# Altium PCB NODE_5_PCB.PcbDoc
Units mm, origin at the board's own origin, x right, y up, seen from the top; angles counter-clockwise.
Board outline 210 x 231 mm, 2 copper layers (Top Layer, Bottom Layer); 126 components, 110 nets, 444 pads, 0 vias.
Unrouted connection lines stored in the file: 255.
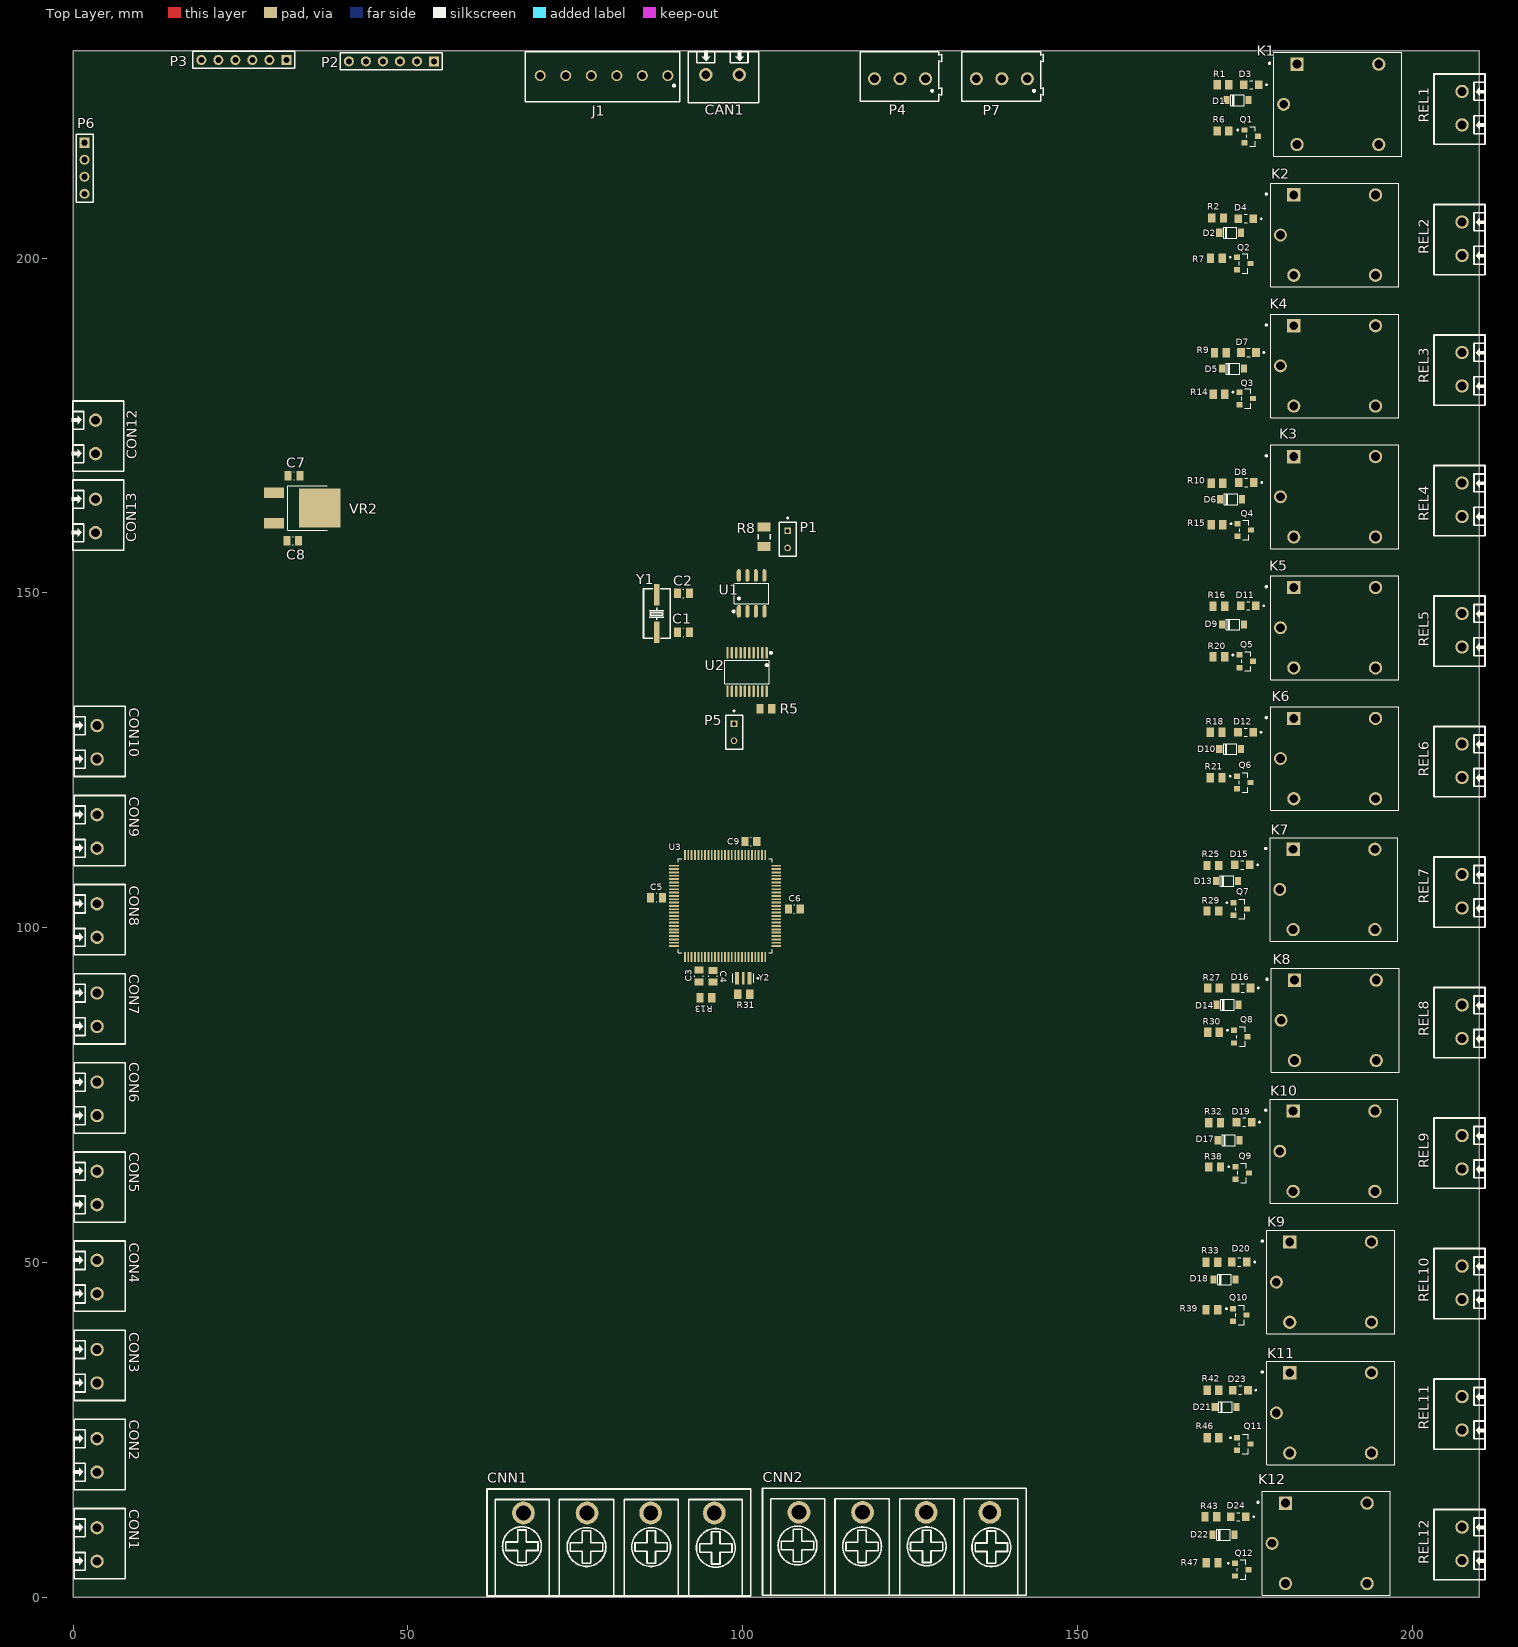
[diagram p0: Top Layer view]
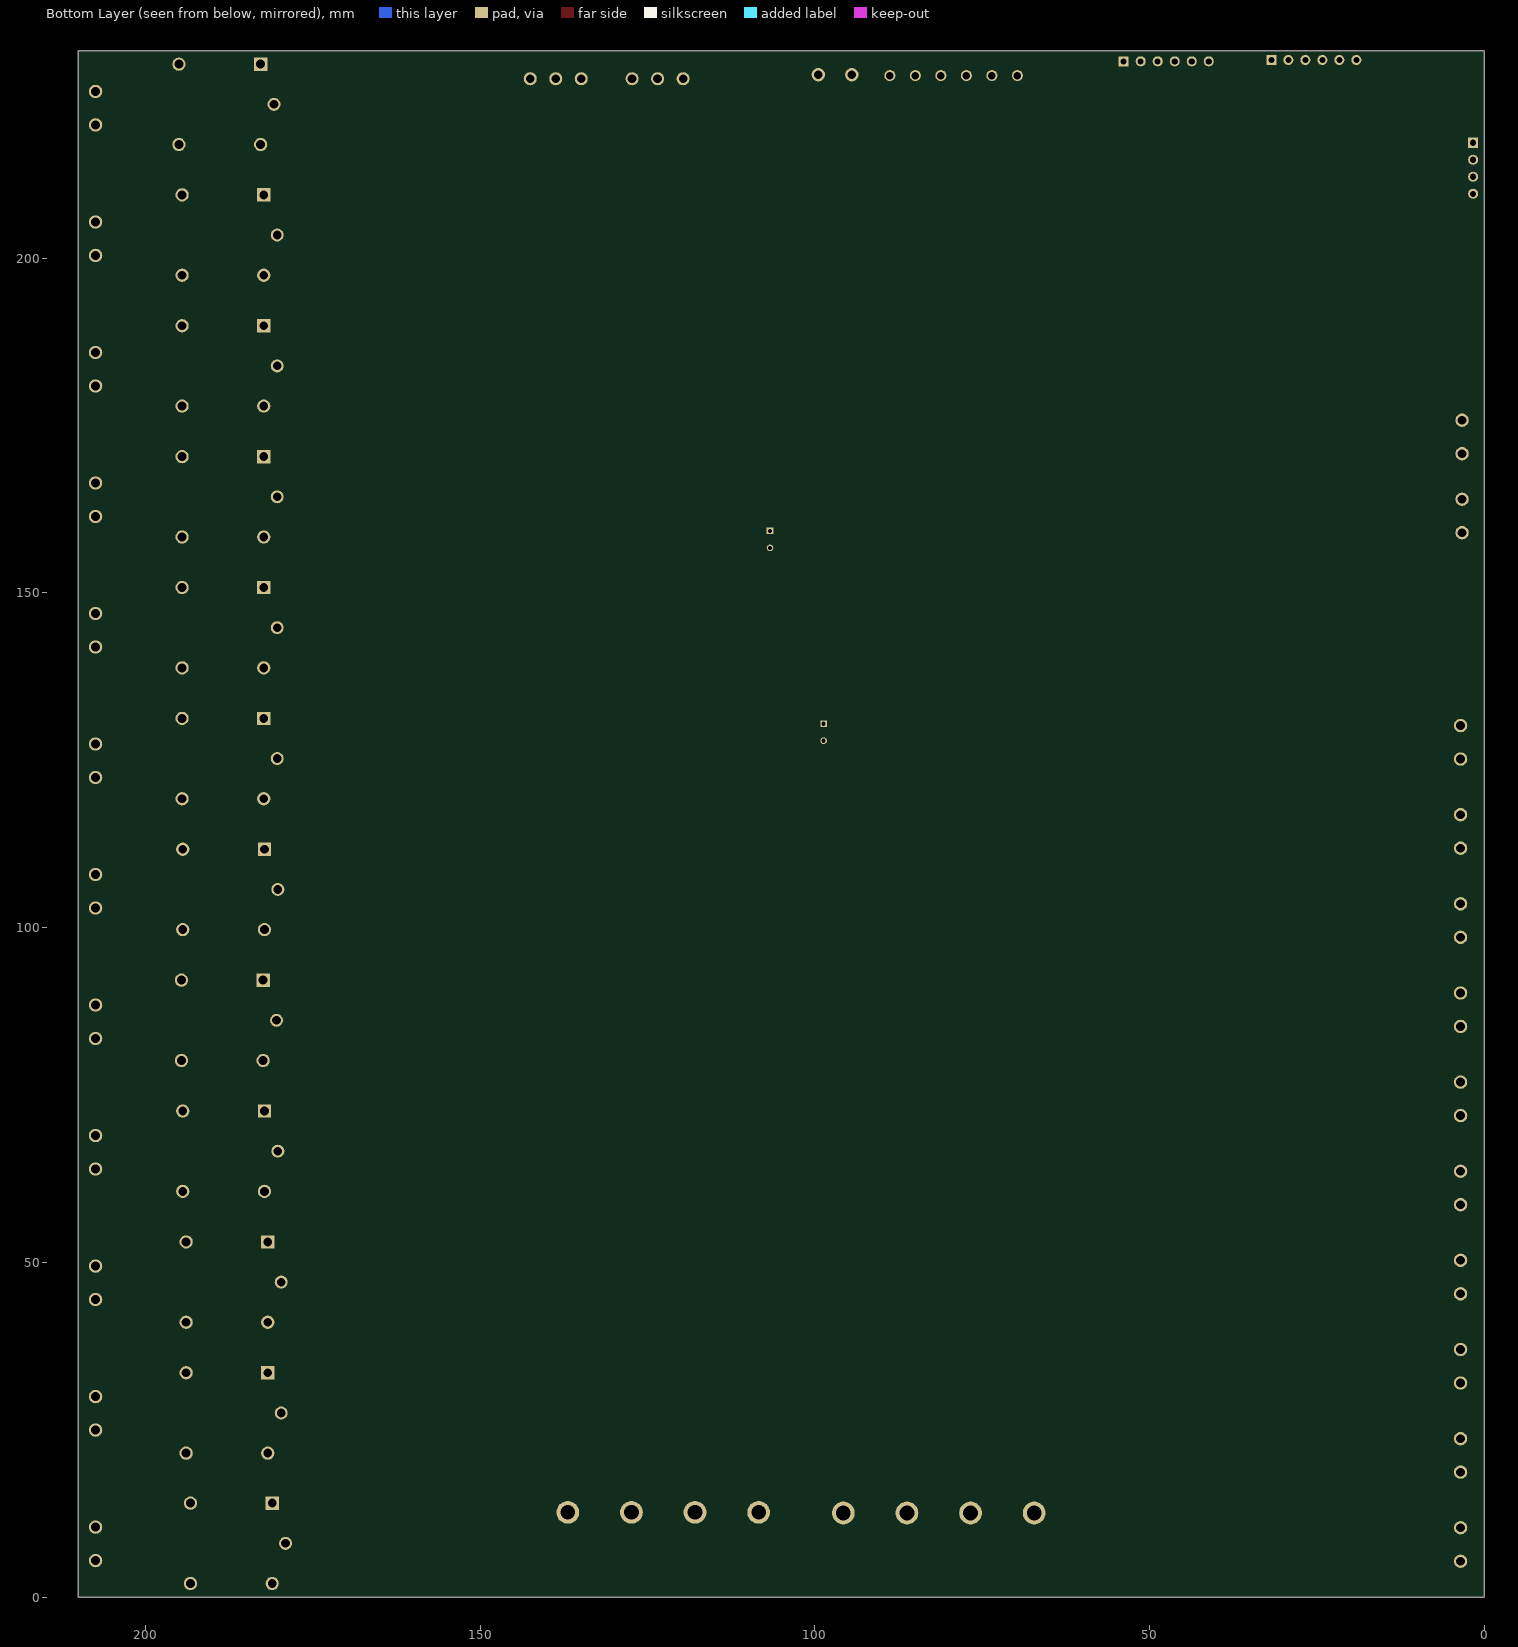
[diagram p1: Bottom Layer view, seen from below]

## Layer stack, top to bottom
Top Solder: solder mask 0.0102, Solder Resist, Dk 3.5
Top Layer: signal copper 0.0356
Dielectric 1: dielectric 0.32, FR-4, Dk 4.8
Bottom Layer: signal copper 0.0356
Bottom Solder: solder mask 0.0102, Solder Resist, Dk 3.5

## Board outline
0,0 0,231 210,231 210,0

## Design rules (kind name [scope] priority, off if disabled: settings)
Clearance Clearance_4 [InNet('PHASE_1') vs InNet('NEUTRAL')] p1: gap=0.254 ignorepadtopadclearanceinfootprint=FALSE except(0: Arc-Hole Track-Hole SMDPad-Hole THPad-Hole Via-Hole Fill-Hole Poly-Hole Region-Hole Text-Hole; 4: Arc-Arc Arc-Track Track-Track)
Clearance Clearance_3 [InNet('PHASE_1') vs InNet('PHASE_3')] p2: gap=0.254 ignorepadtopadclearanceinfootprint=FALSE except(0: Arc-Hole Track-Hole SMDPad-Hole THPad-Hole Via-Hole Fill-Hole Poly-Hole Region-Hole Text-Hole; 4: Arc-Arc Arc-Track Track-Track)
Clearance Clearance_2 [InNet('PHASE_1') vs InNet('PHASE_2')] p3: gap=0.254 ignorepadtopadclearanceinfootprint=FALSE except(0: Arc-Hole Track-Hole SMDPad-Hole THPad-Hole Via-Hole Fill-Hole Poly-Hole Region-Hole Text-Hole; 4: Arc-Arc Arc-Track Track-Track)
Clearance Clearance_1 [InNetClass('RELAY_IN') vs InNetClass('RELAY_OUT')] p4: gap=0.254 ignorepadtopadclearanceinfootprint=FALSE except(0: Arc-Hole Track-Hole SMDPad-Hole THPad-Hole Via-Hole Fill-Hole Poly-Hole Region-Hole Text-Hole; 4: Arc-Arc Arc-Track Track-Track)
Clearance [All] p5: gap=0.254 ignorepadtopadclearanceinfootprint=FALSE except(0: Arc-Hole Track-Hole SMDPad-Hole THPad-Hole Via-Hole Fill-Hole Poly-Hole Region-Hole Text-Hole)
PolygonConnect [All] p1: connectstyle=Direct reliefconductorwidth=0.254 reliefentries=4 polygonreliefangle="90 Angle" airgapwidth=0.254
RoutingVias [All] p1: holewidth=0.711 width=1.27 viastyle="Through Hole" minholewidth=0.711 minwidth=1.27 maxholewidth=0.711 maxwidth=1.27
SolderMaskExpansion [All] p1: expansion=0.102 istentingtop=FALSE
Width [All] p1: maxlimit=2 minlimit=0.254 preferedwidth=0.5
30 further rules are at their usual default settings.

## Classes and differential pairs
net class RELAY_OUT: NetK1_COM NetK2_COM NetK3_COM NetK4_COM NetK5_COM NetK6_COM NetK7_COM NetK8_COM NetK9_COM NetK10_COM NetK11_COM NetK12_COM
net class RELAY_IN: NetK1_NO NetK2_NO NetK3_NO NetK4_NO NetK5_NO NetK6_NO NetK7_NO NetK8_NO NetK9_NO NetK10_NO NetK11_NO NetK12_NO

## Components (designator, comment, footprint, x,y, rotation, side; value= is the part's Value field where it differs from the comment)
C1 "Cap" CAPC2012X135N 91.15,144.125 r180 top value=30pF
C2 "Cap" CAPC2012X135N 91.125,149.95 r0 top value=30pF
C3 "Cap" CAPC2012X135N 93.475,92.775 r270 top value=22pF
C4 "Cap" CAPC2012X135N 95.575,92.765 r270 top value=100nF
C5 "Cap" CAPC2012X135N 87.1,104.5 r0 top value=100nF
C6 "Cap" CAPC2012X135N 107.7,102.8 r0 top value=100nF
C7 "Cap" CAPC2012X135N 33,167.5 r180 top value=10uF
C8 "Cap" CAPC2012X135N 32.8,157.8 r180 top value=10uF
C9 "Cap" CAPC2012X135N 101.2,112.9 r180 top value=100nF
CAN1 "CAN_PORT" 12V_CON 99.49,227.408 r180 top
CNN1 "PWR_CONNECTOR" CONN-TH_JL950-95004B01 81.5,12.6 r0 top
CNN2 "PWR_CONNECTOR" CONN-TH_JL950-95004B01 122.65,12.7 r0 top
CON1 "12V_PORT" 12V_CON 3.575,10.4 r270 top
CON2 "12V_PORT" 12V_CON 3.575,23.711 r270 top
CON3 "12V_PORT" 12V_CON 3.575,37.022 r270 top
CON4 "12V_PORT" 12V_CON 3.575,50.333 r270 top
CON5 "12V_PORT" 12V_CON 3.575,63.644 r270 top
CON6 "12V_PORT" 12V_CON 3.575,76.956 r270 top
CON7 "12V_PORT" 12V_CON 3.575,90.267 r270 top
CON8 "12V_PORT" 12V_CON 3.575,103.578 r270 top
CON9 "12V_PORT" 12V_CON 3.575,116.889 r270 top
CON10 "12V_PORT" 12V_CON 3.575,130.2 r270 top
CON12 "12V_PORT" 12V_CON 3.35,175.8 r270 top
CON13 "12V_PORT" 12V_CON 3.35,164 r270 top
D1 "Diode" SOD-123FL 173.9,223.6 r180 top
D2 "Diode" SOD-123FL 172.8,203.8 r180 top
D3 "LED1" LED_7012X1 175.925,225.9 r180 top
D4 "LED1" LED_7012X1 175.125,205.9 r180 top
D5 "Diode" SOD-123FL 173.2,183.5 r180 top
D6 "Diode" SOD-123FL 172.9,164 r180 top
D7 "LED1" LED_7012X1 175.525,185.9 r180 top
D8 "LED1" LED_7012X1 175.2,166.5 r180 top
D9 "Diode" SOD-123FL 173.2,145.3 r180 top
D10 "Diode" SOD-123FL 172.8,126.7 r180 top
D11 "LED1" LED_7012X1 175.5,148.1 r180 top
D12 "LED1" LED_7012X1 175.1,129.2 r180 top
D13 "Diode" SOD-123FL 172.3,107 r180 top
D14 "Diode" SOD-123FL 172.4,88.5 r180 top
D15 "LED1" LED_7012X1 174.6,109.4 r180 top
D16 "LED1" LED_7012X1 174.7,91 r180 top
D17 "Diode" SOD-123FL 172.575,68.275 r180 top
D18 "Diode" SOD-123FL 171.95,47.475 r180 top
D19 "LED1" LED_7012X1 174.875,70.975 r180 top
D20 "LED1" LED_7012X1 174.15,50.075 r180 top
D21 "Diode" SOD-123FL 172.125,28.45 r180 top
D22 "Diode" SOD-123FL 171.8,9.35 r180 top
D23 "LED1" LED_7012X1 174.325,30.95 r180 top
D24 "LED1" LED_7012X1 174,12.05 r180 top
J1 "FOT-6PIN" 691243310006 79.285,227.264 r180 top
K1 "SRD-05VDC-SL-C" RELAY_SRD-05VDC-SL-C 188.875,222.975 r0 top
K2 "SRD-05VDC-SL-C" RELAY_SRD-05VDC-SL-C 188.4,203.455 r0 top
K3 "SRD-05VDC-SL-C" RELAY_SRD-05VDC-SL-C 188.4,164.364 r0 top
K4 "SRD-05VDC-SL-C" RELAY_SRD-05VDC-SL-C 188.4,183.909 r0 top
K5 "SRD-05VDC-SL-C" RELAY_SRD-05VDC-SL-C 188.4,144.818 r0 top
K6 "SRD-05VDC-SL-C" RELAY_SRD-05VDC-SL-C 188.4,125.273 r0 top
K7 "SRD-05VDC-SL-C" RELAY_SRD-05VDC-SL-C 188.3,105.727 r0 top
K8 "SRD-05VDC-SL-C" RELAY_SRD-05VDC-SL-C 188.5,86.182 r0 top
K9 "SRD-05VDC-SL-C" RELAY_SRD-05VDC-SL-C 187.8,47.091 r0 top
K10 "SRD-05VDC-SL-C" RELAY_SRD-05VDC-SL-C 188.3,66.636 r0 top
K11 "SRD-05VDC-SL-C" RELAY_SRD-05VDC-SL-C 187.8,27.545 r0 top
K12 "SRD-05VDC-SL-C" RELAY_SRD-05VDC-SL-C 187.15,8.075 r0 top
P1 "Header 2" SAMTEC_TS-102-G-A 106.7,158 r270 top
P2 "Header 6" HDR1X6 53.88,229.4 r180 top
P3 "Header 6" HDR1X6 31.84,229.6 r180 top
P4 "Header 3" 3PIN_H 123.49,226.8 r180 top
P5 "Header 2" SAMTEC_TS-102-G-A 98.7,129.2 r270 top
P6 "Header 4" HDR1X4 1.7,217.24 r270 top
P7 "Header 3" 3PIN_H 138.7,226.8 r180 top
Q1 "NPN" TRANS_FMMT491TA 175.925,218.2 r0 top
Q2 "NPN" TRANS_FMMT491TA 174.8,199.2 r0 top
Q3 "NPN" TRANS_FMMT491TA 175.2,179.05 r0 top
Q4 "NPN" TRANS_FMMT491TA 174.9,159.4 r0 top
Q5 "NPN" TRANS_FMMT491TA 175.2,139.8 r0 top
Q6 "NPN" TRANS_FMMT491TA 174.8,121.7 r0 top
Q7 "NPN" TRANS_FMMT491TA 174.3,102.8 r0 top
Q8 "NPN" TRANS_FMMT491TA 174.4,83.75 r0 top
Q9 "NPN" TRANS_FMMT491TA 174.575,63.375 r0 top
Q10 "NPN" TRANS_FMMT491TA 174.25,42.175 r0 top
Q11 "NPN" TRANS_FMMT491TA 174.825,22.9 r0 top
Q12 "NPN" TRANS_FMMT491TA 174.5,4.15 r0 top
R1 "R1K" RESC2013X06N 171.725,225.9 r180 top value=1K
R2 "R1K" RESC2013X06N 170.925,206 r180 top value=1K
R5 "10K" RESC2013X06N 103.45,132.725 r0 top
R6 "R1K" RESC2013X06N 171.725,219 r0 top value=1K
R7 "R1K" RESC2013X06N 170.725,200 r0 top value=1K
R8 "120R" CRCW1206120RFKEAHP 103.2,158.4 r270 top value=120
R9 "R1K" RESC2013X06N 171.325,185.9 r180 top value=1K
R10 "R1K" RESC2013X06N 170.825,166.4 r180 top value=1K
R13 "1KR" RESC2013X06N 94.5,89.575 r0 top value=1K
R14 "R1K" RESC2013X06N 171.125,179.7 r0 top value=1K
R15 "R1K" RESC2013X06N 170.825,160.2 r0 top value=1K
R16 "R1K" RESC2013X06N 171.1,148 r180 top value=1K
R18 "R1K" RESC2013X06N 170.7,129.2 r180 top value=1K
R20 "R1K" RESC2013X06N 171.1,140.5 r0 top value=1K
R21 "R1K" RESC2013X06N 170.7,122.4 r0 top value=1K
R25 "R1K" RESC2013X06N 170.2,109.3 r180 top value=1K
R27 "R1K" RESC2013X06N 170.3,91 r180 top value=1K
R29 "R1K" RESC2013X06N 170.2,102.5 r0 top value=1K
R30 "R1K" RESC2013X06N 170.3,84.4 r0 top value=1K
R31 "R1M" RESC2013X06N 100.15,90.075 r180 top value=1M
R32 "R1K" RESC2013X06N 170.475,70.875 r180 top value=1K
R33 "R1K" RESC2013X06N 170.05,50.075 r180 top value=1K
R38 "R1K" RESC2013X06N 170.475,64.275 r0 top value=1K
R39 "R1K" RESC2013X06N 170.05,42.975 r0 top value=1K
R42 "R1K" RESC2013X06N 170.225,30.95 r180 top value=1K
R43 "R1K" RESC2013X06N 169.9,12.05 r180 top value=1K
R46 "R1K" RESC2013X06N 170.225,23.85 r0 top value=1K
R47 "R1K" RESC2013X06N 170.1,5.15 r0 top value=1K
REL1 "RELAY_OUT" 12V_CON 207.425,219.9 r90 top
REL2 "RELAY_OUT" 12V_CON 207.425,200.409 r90 top
REL3 "RELAY_OUT" 12V_CON 207.425,180.918 r90 top
REL4 "RELAY_OUT" 12V_CON 207.425,161.427 r90 top
REL5 "RELAY_OUT" 12V_CON 207.425,141.936 r90 top
REL6 "RELAY_OUT" 12V_CON 207.425,122.445 r90 top
REL7 "RELAY_OUT" 12V_CON 207.425,102.954 r90 top
REL8 "RELAY_OUT" 12V_CON 207.425,83.464 r90 top
REL9 "RELAY_OUT" 12V_CON 207.425,63.973 r90 top
REL10 "RELAY_OUT" 12V_CON 207.425,44.482 r90 top
REL11 "RELAY_OUT" 12V_CON 207.425,24.991 r90 top
REL12 "RELAY_OUT" 12V_CON 207.425,5.5 r90 top
U1 "TJA1050DRG" "SOP-8_L4.9-W3.9-P1.27-LS6.0-BL - duplicate" 101.325,149.95 r0 top
U2 "MCP2515T-I/ST" TSSOP-20_L6.5-W4.4-P0.65-LS6.4-BL 100.65,138.2 r180 top
U3 "ATMEGA2560-16AU" QFP50P1600X1600X120-100N 97.375,103.275 r0 top
VR2 "5-3.3V" TO-252-2_L6.6-W6.1-P4.57-LS9.9-BR-CW 33.4,162.7 r180 top
Y1 "XTAL" CRYSTAL-SMD_L7.4-W4.0-LS8.0 87.175,146.925 r270 top value=8MHz
Y2 "CSTCE16M0V53-R0" OSC_CSTCE16M0V53-R0 100.075,92.475 r180 top

## Footprints (in the part's own frame and the unit in brackets; to place one, negate y for a bottom-side part, rotate by r counter-clockwise, add the part's x,y. Pads: shape width x height; smd on the part's side, far side on the other; paste and mask are expansions set on the pad)
3PIN_H [mm]
  round 1.95 hole 1.3: 1(-3.81,0) 2(0,0) 3(3.81,0)
  silkscreen extent -6.21,-4.06 5.97,3.34, body extent -5.84,-4.08 5.99,3.32, height 8.51
12V_CON [mm]
  round 2 hole 1.3 paste+0 mask+0.051: 1(0,0) 2(5,0)
  silkscreen extent -2.88,-3.56 7.62,4.19, body extent -2.96,-3.43 7.54,4.17, height 10
691243310006 [mm]
  round 1.65 hole 1.1: 1(-9.525,0) 2(-5.715,0) 3(-1.905,0) 4(1.905,0) 5(5.715,0) 6(9.525,0)
  silkscreen extent -11.28,-3.6 11.78,3.9, body extent -11.18,-3.68 11.68,3.62, height 9.1
CAPC2012X135N [mm]
  rect 1.05x1.38 smd: 1(-0.89,0) 2(0.89,0)
  silkscreen extent -0.05,-0.63 0.05,0.63, body extent -1,-0.63 1,0.63, height 1.35
CONN-TH_JL950-95004B01 [mm]
  round 3.4 hole 2.2 paste+0 mask+0.051: 1(-14.25,0) 2(-4.75,0) 3(4.75,0) 4(14.25,0)
  silkscreen extent -19.7,-12.4 19.7,3.6
CRCW1206120RFKEAHP [mm] "Chip Resistor, 2-Leads, Body 3.10x1.60mm, IPC Medium Density"
  rect 1.4x1.95 smd: 1(-1.45,0) 2(1.45,0)
  silkscreen extent -0.35,-0.87 0.35,0.87, body extent -1.65,-0.87 1.65,0.87, height 0.65
CRYSTAL-SMD_L7.4-W4.0-LS8.0 [mm]
  rect 3.2x0.8 smd paste+0 mask+0.05: 1(-2.8,0) 2(2.8,0)
  silkscreen extent -3.7,-2 3.7,2, body extent -3.84,-2.08 3.76,2.02, height 2.23
HDR1X4 [mm] "Connector; Header; 4 Position"
  rect 1.5x1.5 hole 0.9: 1(0,0)
  round 1.5 hole 0.9: 2(2.54,0) 3(5.08,0) 4(7.62,0)
  silkscreen extent -1.27,-1.27 8.89,1.27
HDR1X6 [mm] "Connector; Header; 6 Position"
  rect 1.5x1.5 hole 0.9: 1(0,0)
  round 1.5 hole 0.9: 2(2.54,0) 3(5.08,0) 4(7.62,0) 5(10.16,0) 6(12.7,0)
  silkscreen extent -1.27,-1.27 13.97,1.27
LED_7012X1 [mm]
  rect 1.15x1.3 smd: 1(1.125,0) 2(-1.125,0)
  silkscreen extent -2.4,-0.63 0.23,0.63, body extent -1,-0.62 1,0.62, height 0.73
OSC_CSTCE16M0V53-R0 [mm]
  rect 0.6x1.9 smd: 1(-0.95,0) 3(0.95,0)
  rect 0.4x1.9 smd: 2(0,0)
  silkscreen extent -2.3,-0.65 1.6,0.65, body extent -1.6,-0.65 1.6,0.65, height 1
QFP50P1600X1600X120-100N [mil]
  rect 58x11 smd: 1(-300,236) 2(-300,217) 3(-300,197) 4(-300,177) 5(-300,157) 6(-300,138) 7(-300,118) 8(-300,98) 9(-300,79) 10(-300,59) 11(-300,39) 12(-300,20) 13(-300,0) 14(-300,-20) 15(-300,-39) 16(-300,-59) 17(-300,-79) 18(-300,-98) 19(-300,-118) 20(-300,-138) 21(-300,-157) 22(-300,-177) 23(-300,-197) 24(-300,-217) 25(-300,-236) 51(300,-236) 52(300,-217) 53(300,-197) 54(300,-177) 55(300,-157) 56(300,-138) 57(300,-118) 58(300,-98) 59(300,-79) 60(300,-59) 61(300,-39) 62(300,-20) 63(300,0) 64(300,20) 65(300,39) 66(300,59) 67(300,79) 68(300,98) 69(300,118) 70(300,138) 71(300,157) 72(300,177) 73(300,197) 74(300,217) 75(300,236)
  rect 11x58 smd: 26(-236,-300) 27(-217,-300) 28(-197,-300) 29(-177,-300) 30(-157,-300) 31(-138,-300) 32(-118,-300) 33(-98,-300) 34(-79,-300) 35(-59,-300) 36(-39,-300) 37(-20,-300) 38(0,-300) 39(20,-300) 40(39,-300) 41(59,-300) 42(79,-300) 43(98,-300) 44(118,-300) 45(138,-300) 46(157,-300) 47(177,-300) 48(197,-300) 49(217,-300) 50(236,-300) 76(236,300) 77(217,300) 78(197,300) 79(177,300) 80(157,300) 81(138,300) 82(118,300) 83(98,300) 84(79,300) 85(59,300) 86(39,300) 87(20,300) 88(0,300) 89(-20,300) 90(-39,300) 91(-59,300) 92(-79,300) 93(-98,300) 94(-118,300) 95(-138,300) 96(-157,300) 97(-177,300) 98(-197,300) 99(-217,300) 100(-236,300)
  silkscreen extent -276,-276 276,276, body extent -315,-315 315,315, height 47
RELAY_SRD-05VDC-SL-C [mm]
  rect 1.98x1.98 / inner round 1.98 / far side rect 1.98x1.98 hole 1.32: A1(-6.1,6)
  round 1.98 hole 1.32: A2(-6.1,-6) NC(6.1,6) NO(6.1,-6)
  round 1.935 hole 1.29: COM(-8.1,0)
  silkscreen extent -10.3,-7.75 9.55,7.75, body extent -9.6,-7.8 9.6,7.8, height 15.8
RESC2013X06N [mm] "Chip Resistor, 2-Leads, Body 2.00x1.27mm, IPC Medium Density"
  rect 1.1x1.4 smd: 1(-0.875,0) 2(0.875,0)
  body extent -1.07,-0.7 1.07,0.7, height 0.65
SAMTEC_TS-102-G-A [mm]
  rect 0.985x0.985 hole 0.635: 1(-1.27,0)
  round 0.985 hole 0.635: 2(1.27,0)
  silkscreen extent -3.29,-1.27 2.54,1.27, body extent -2.64,-1.4 2.64,1.14, height 8.29
SOD-123FL [mil]
  rect 36x48 smd: 1(-64.5,0) 2(64.5,0)
  silkscreen extent -39,-31 39,31, body extent -73,-32 73,32, height 48
"SOP-8_L4.9-W3.9-P1.27-LS6.0-BL - duplicate" [mm]
  oval 0.63x1.865 smd paste+0 mask+0.051: 1(-1.905,-2.682) 2(-0.635,-2.682) 3(0.635,-2.682) 4(1.905,-2.682) 5(1.905,2.682) 6(0.635,2.682) 7(-0.635,2.682) 8(-1.905,2.682)
  silkscreen extent -2.82,-2.83 2.58,1.52
TO-252-2_L6.6-W6.1-P4.57-LS9.9-BR-CW [mm]
  rect 3x1.6 smd paste+0 mask+0.051: 1(3.424,-2.29) 3(3.424,2.29)
  rect 6.2x5.8 smd paste+0 mask+0.051: 2(-3.424,0)
  silkscreen extent -4.58,-3.35 1.38,3.35, body extent -6.22,-3.29 3.7,3.29, height 2.29
TRANS_FMMT491TA [mm]
  rect 0.9x0.8 smd: 1(-1,0.95) 2(-1,-0.95) 3(1,0)
  silkscreen extent -2.1,-1.45 0.65,1.45, body extent -1.2,-1.45 1.2,1.45, height 1.15
TSSOP-20_L6.5-W4.4-P0.65-LS6.4-BL [mm]
  oval 0.364x1.742 smd paste+0 mask+0.051: 1(-2.925,-2.871) 2(-2.275,-2.871) 3(-1.625,-2.871) 4(-0.975,-2.871) 5(-0.325,-2.871) 6(0.325,-2.871) 7(0.975,-2.871) 8(1.625,-2.871) 9(2.275,-2.871) 10(2.925,-2.871) 11(2.925,2.871) 12(2.275,2.871) 13(1.625,2.871) 14(0.975,2.871) 15(0.325,2.871) 16(-0.325,2.871) 17(-0.975,2.871) 18(-1.625,2.871) 19(-2.275,2.871) 20(-2.925,2.871)
  silkscreen extent -3.71,-3.02 3.33,1.77, body extent -3.25,-3.3 3.25,3.1, height 1.06

## Part data
C1 C2: "Capacitor", Part Number=TCC0805COG300J500BT, LatestRevisionDate=17-Jul-2002, LatestRevisionNote="Re-released for DXP Platform.", PackageDescription="Radial Cap, Thru-Hole; 2 Leads; 0.3 in Pin Spacing", PackageReference=RAD-0.3, Published=8-Jun-2000, Publisher="Altium Limited"
C3: "Capacitor", Part Number=TCC0805COG220J500BT, LatestRevisionDate=17-Jul-2002, LatestRevisionNote="Re-released for DXP Platform.", PackageDescription="Radial Cap, Thru-Hole; 2 Leads; 0.3 in Pin Spacing", PackageReference=RAD-0.3, Published=8-Jun-2000, Publisher="Altium Limited"
C4 C5 C6 C9: "Capacitor", Part Number=TCC0805X7R104M500DT, LatestRevisionDate=17-Jul-2002, LatestRevisionNote="Re-released for DXP Platform.", PackageDescription="Radial Cap, Thru-Hole; 2 Leads; 0.3 in Pin Spacing", PackageReference=RAD-0.3, Published=8-Jun-2000, Publisher="Altium Limited"
C7 C8: "Capacitor", Part Number=CL21A106KOQNNNE, LatestRevisionDate=17-Jul-2002, LatestRevisionNote="Re-released for DXP Platform.", PackageDescription="Radial Cap, Thru-Hole; 2 Leads; 0.3 in Pin Spacing", PackageReference=RAD-0.3, Published=8-Jun-2000, Publisher="Altium Limited"
CAN1: library part 2PIN_CON_1
CNN1 CNN2: Part Number=JL950-95004B01
CON1 CON2 CON3 CON4 CON5 CON6 CON7 CON8 CON9 CON10 CON12 CON13: library part 2PIN_CON
D1 D2 D5 D6 D9 D10 D13 D14 D17 D18 D21 D22: "Default Diode", Part Number=SM4007PL, Code_JEDEC=DO-214-AB, LatestRevisionDate=17-Jul-2002, LatestRevisionNote="Re-released for DXP Platform.", PackageDescription="DO-214-AB/SMC; 2 C-Bend Leads; Body 7.9 x 5.9 mm, inc. leads (LxW)", PackageReference=SMC, PackageVersion=Sep-1996, Published=8-Jun-2000, Publisher="Altium Limited"
D3 D4 D7 D8 D11 D12 D15 D16 D19 D20 D23 D24: "Typical RED GaAs LED", Part Number=7012X1, LatestRevisionDate=08-Jul-2005, LatestRevisionNote="Mech Layer 1 removed.", PackageDescription="LED; 2 Leads", PackageReference=LED-1, Published=8-Jun-2000, Publisher="Altium Limited"
J1: "6 Position Wire to Board Terminal Block Horizontal with Board 0.150 (3.81mm) Through Hole", Package=None, Part Number=DB125-3.81-6P-GN-S, Check_prices=https://www.snapeda.com/parts/691243310006/Wurth+Elektronik/view-part/?ref=eda, MF="WÃ¼rth Elektronik", MP=691243310006, SnapEDA_Link=https://www.snapeda.com/parts/691243310006/Wurth+Elektronik/view-part/?ref=snap
K1 K2 K3 K4 K5 K6 K7 K8 K9 K10 K11 K12: "5V Trigger Relay Module For Arduino And Raspberry Pi 5V Trigger Relay Module For Arduino And Raspberry Pi", Package="NON STANDARD-5 Songle Relay", Availability="Not in stock", Check_prices=https://www.snapeda.com/parts/SRD-05VDC-SL-C/Songle+Relay/view-part/?ref=eda, MF="Songle Relay", MP=SRD-05VDC-SL-C, Part Number=SRD-05VDC-SL-C, Price=None, SnapEDA_Link=https://www.snapeda.com/parts/SRD-05VDC-SL-C/Songle+Relay/view-part/?ref=snap
P1: "Header, 2-Pin", LatestRevisionDate=17-Jul-2002, LatestRevisionNote="Re-released for DXP Platform.", Publisher="Altium Limited"
P2 P3: "Header, 6-Pin", Part Number=P125-1106A0BS116A1, LatestRevisionDate=17-Jul-2002, LatestRevisionNote="Re-released for DXP Platform.", Publisher="Altium Limited"
P4 P7: "Header, 3-Pin", Part Number=DB125-3.81-3P-BK-S, LatestRevisionDate=17-Jul-2002, LatestRevisionNote="Re-released for DXP Platform.", Publisher="Altium Limited"
P5: "Header, 2-Pin", Part Number=PH-01078, LatestRevisionDate=17-Jul-2002, LatestRevisionNote="Re-released for DXP Platform.", Publisher="Altium Limited"
P6: "Header, 4-Pin", Part Number=HB-PH3-25414PB2GOP, LatestRevisionDate=17-Jul-2002, LatestRevisionNote="Re-released for DXP Platform.", Publisher="Altium Limited"
Q1 Q2 Q3 Q4 Q5 Q6 Q7 Q8 Q9 Q10 Q11 Q12: "NPN Bipolar Transistor", Part Number=FMMT491TA, Code_JEDEC=TO-226-AA, LatestRevisionDate=17-Jul-2002, LatestRevisionNote="Re-released for DXP Platform.", PackageDescription="TO, Flat Index; 3 In-Line, Axial Leads; Body Dia. 4.8mm; Leads 0.55 x 0.51 mm (max)", PackageReference=TO-226-AA, Published=8-Jun-2000, Publisher="Altium Limited"
R1 R2 R6 R7 R9 R10 R14 R15 R16 R18 R20 R21 R25 R27 R29 R30 R32 R33 R38 R39 R42 R43 R46 R47: library part Res2, "RES 0805", Part Number=0805W8J0102T5E, LatestRevisionDate=17-Jul-2002, LatestRevisionNote="Re-released for DXP Platform.", PackageDescription="Axial Device, Thru-Hole; 2 Leads; 0.4 in Pin Spacing", PackageReference=AXIAL-0.4, Parameter 1=RC0805JR-071KL, Published=8-Jun-2000, Publisher="Altium Limited"
R5: library part Res2, "Resistor", Part Number=RC0805JR-0710KL, LatestRevisionDate=17-Jul-2002, LatestRevisionNote="Re-released for DXP Platform.", PackageDescription="Axial Device, Thru-Hole; 2 Leads; 0.4 in Pin Spacing", PackageReference=AXIAL-0.4, Published=8-Jun-2000, Publisher="Altium Limited"
R8: library part Res2, "Resistor", Part Number=CRCW1206120RFKEAHP, LatestRevisionDate=17-Jul-2002, LatestRevisionNote="Re-released for DXP Platform.", PackageDescription="Axial Device, Thru-Hole; 2 Leads; 0.4 in Pin Spacing", PackageReference=AXIAL-0.4, Published=8-Jun-2000, Publisher="Altium Limited"
R13: library part Res2, "Resistor", LatestRevisionDate=17-Jul-2002, LatestRevisionNote="Re-released for DXP Platform.", PackageDescription="Axial Device, Thru-Hole; 2 Leads; 0.4 in Pin Spacing", PackageReference=AXIAL-0.4, Parameter 1=RC0805JR-071KL, Published=8-Jun-2000, Publisher="Altium Limited"
R31: library part Res1, "Resistor", Part Number=RC0805JR-071KL, LatestRevisionDate=17-Jul-2002, LatestRevisionNote="Re-released for DXP Platform.", PackageDescription="Axial Device, Thru-Hole; 2 Leads; 0.3 in Pin Spacing", PackageReference=AXIAL-0.3, Published=8-Jun-2000, Publisher="Altium Limited"
REL1 REL2 REL3 REL4 REL5 REL6 REL7 REL8 REL9 REL10 REL11 REL12: library part 2PIN_CON_3, Part Number=MX126-5.0-02P-GN01-Cu-S-A
U1: JLCPCB Part Class="Extended Part", Manufacturer=HGC(深圳汉芯), Add into BOM=yes, Convert to PCB=yes, Datasheet=https://atta.szlcsc.com/upload/public/pdf/source/20231229/9EC40A6172CAB0350BF7AF3421F4DEBF.pdf, Device=TJA1050DRG, LCSC Part Name=TJA1050DRG, Manufacturer Part=TJA1050DRG, Part Number=TJA1050DRG, Supplier=LCSC, Supplier Footprint=SOP-8, Supplier Part=C19723770, Symbol=TJA1050DRG
U2: JLCPCB Part Class="Extended Part", LCSC Part Name=2.7V~5.5V, Manufacturer=MICROCHIP(美国微芯), Operating Temperature=-40℃~+85℃, Supply Current=10mA, Add into BOM=yes, Convert to PCB=yes, Datasheet=https://atta.szlcsc.com/upload/public/pdf/source/20180521/C185941_CF4E8B602AE128DB1B8E6B0AB1F829A7.pdf, Device=MCP2515T-I/ST, Manufacturer Part=MCP2515T-I/ST, Supplier=LCSC, Supplier Footprint=TSSOP-20, Supplier Part=C185941, Supply Voltage=2.7V~5.5V, Symbol=MCP2515T-I/ST
U3: "AVR AVRÂ® ATmega Microcontroller IC 8-Bit 16MHz 256KB (128K x 16) FLASH 100-TQFP (14x14)", Package="TQFP-100 Microchip", Availability="In Stock", Check_prices=https://www.snapeda.com/parts/ATMEGA2560-16AU/Microchip/view-part/?ref=eda, MF=Microchip, MP=ATMEGA2560-16AU, Price=None, Purchase-URL=https://pricing.snapeda.com/search?q=ATMEGA2560-16AU&ref=eda, SnapEDA_Link=https://www.snapeda.com/parts/ATMEGA2560-16AU/Microchip/view-part/?ref=snap
VR2: library part "Volt Reg", "Voltage Regulator", Part Number=AP7363-33D-13, LatestRevisionDate=29-May-2009, LatestRevisionNote="IPC-7351 Footprint Added.", PackageDescription="3-Pin Transistor Outline Package 2.54 mm Pitch, 15.1 mm Lead Span", PackageReference=D2PAK, Published=24-Mar-1999, Publisher="Altium Limited"
Y1: "Crystal Oscillator", Part Number=S47SMD8.000M12PF20R30B3, LatestRevisionDate=17-Jul-2002, LatestRevisionNote="Re-released for DXP Platform.", PackageDescription="Crystal, Thru-Hole; 2 Leads; Body 3.1 x 8.2 mm (Dia.xH)", PackageReference=R38, Published=8-Jun-2000, Publisher="Altium Limited"
Y2: "16 MHz Ceramic Resonator Built in Capacitor 15 pF Â±0.3% -20Â°C ~ 80Â°C Surface Mount", Package="SMD-3 Murata", Availability="In Stock", Check_prices=https://www.snapeda.com/parts/CSTCE16M0V53-R0/Murata+Electronics+North+America/view-part/?ref=eda, MF=Murata, MP=CSTCE16M0V53-R0, Part Number=CSTCE16M0V53-R0, Price=None, Purchase-URL=https://pricing.snapeda.com/search/part/CSTCE16M0V53-R0/?ref=eda, SnapEDA_Link=https://www.snapeda.com/parts/CSTCE16M0V53-R0/Murata+Electronics+North+America/view-part/?ref=snap

## Nets (pads, with @x,y where several pads share a name; then routed paths per layer and width w, separated by ;. In a path a pad name is that pad's centre, name@x,y a point inside that pad or via, vN(x,y) a via of type N, cw(c..) or ccw(c..) an arc to the next point about the centre after c; other vN are vias at no path point)
3V3: C8.2 J1.1 VR2.3
5V: C4.1 C5.1 C6.1 C7.2 C9.1 CON13.1 D1.2 D2.2 D5.2 D6.2 D9.2 D10.2 D13.2 D14.2 D17.2 D18.2 D21.2 D22.2 K1.A1 K2.A1 K3.A1 K4.A1 K5.A1 K6.A1 K7.A1 K8.A1 K9.A1 K10.A1 K11.A1 K12.A1 P2.1 P3.1 P4.1 P6.1 R1.2 R2.2 R5.2 R9.2 R10.2 R13.2 R16.2 R18.2 R25.2 R27.2 R32.2 R33.2 R42.2 R43.2 U1.3 U2.20 U3.10 U3.31 U3.61 U3.80 U3.98 U3.100 VR2.1
12V: CON1.1 CON2.1 CON3.1 CON4.1 CON5.1 CON6.1 CON7.1 CON8.1 CON9.1 CON10.1 CON12.1 P7.1
CAN_ENABLE: U2.18 U3.19
CAN_H: CAN1.1 R8.2 U1.7
CAN_INT: U2.13 U3.45
CAN_L: CAN1.2 P1.2 U1.6
GND: C1.1 C2.2 C3.2 C4.2 C5.2 C6.2 C7.1 C8.1 C9.2 CON1.2 CON2.2 CON3.2 CON4.2 CON5.2 CON6.2 CON7.2 CON8.2 CON9.2 CON10.2 CON12.2 CON13.2 J1.2 P2.2 P3.2 P4.3 P6.4 P7.3 Q1.2 Q2.2 Q3.2 Q4.2 Q5.2 Q6.2 Q7.2 Q8.2 Q9.2 Q10.2 Q11.2 Q12.2 U1.2 U1.8 U2.10 U3.11 U3.32 U3.62 U3.81 U3.99 VR2.2 Y2.2
MISO: P3.4 P5.2 U3.22
MOSI: P3.3 U2.16 U3.21
NetC1_2: C1.2 U2.9 Y1.2
NetC2_1: C2.1 U2.8 Y1.1
NetD1_1: D1.1 D3.2 K1.A2 Q1.3
NetD2_1: D2.1 D4.2 K2.A2 Q2.3
NetD3_1: D3.1 R1.1
NetD4_1: D4.1 R2.1
NetD5_1: D5.1 D7.2 K4.A2 Q3.3
NetD6_1: D6.1 D8.2 K3.A2 Q4.3
NetD7_1: D7.1 R9.1
NetD8_1: D8.1 R10.1
NetD9_1: D9.1 D11.2 K5.A2 Q5.3
NetD10_1: D10.1 D12.2 K6.A2 Q6.3
NetD11_1: D11.1 R16.1
NetD12_1: D12.1 R18.1
NetD13_1: D13.1 D15.2 K7.A2 Q7.3
NetD14_1: D14.1 D16.2 K8.A2 Q8.3
NetD15_1: D15.1 R25.1
NetD16_1: D16.1 R27.1
NetD17_1: D17.1 D19.2 K10.A2 Q9.3
NetD18_1: D18.1 D20.2 K9.A2 Q10.3
NetD19_1: D19.1 R32.1
NetD20_1: D20.1 R33.1
NetD21_1: D21.1 D23.2 K11.A2 Q11.3
NetD22_1: D22.1 D24.2 K12.A2 Q12.3
NetD23_1: D23.1 R42.1
NetD24_1: D24.1 R43.1
NetK1_COM: K1.COM REL1.2
NetK1_NO: K1.NO REL1.1
NetK2_COM: K2.COM REL2.2
NetK2_NO: K2.NO REL2.1
NetK3_COM: K3.COM REL4.2
NetK3_NO: K3.NO REL4.1
NetK4_COM: K4.COM REL3.2
NetK4_NO: K4.NO REL3.1
NetK5_COM: K5.COM REL5.2
NetK5_NO: K5.NO REL5.1
NetK6_COM: K6.COM REL6.2
NetK6_NO: K6.NO REL6.1
NetK7_COM: K7.COM REL7.2
NetK7_NO: K7.NO REL7.1
NetK8_COM: K8.COM REL8.2
NetK8_NO: K8.NO REL8.1
NetK9_COM: K9.COM REL10.2
NetK9_NO: K9.NO REL10.1
NetK10_COM: K10.COM REL9.2
NetK10_NO: K10.NO REL9.1
NetK11_COM: K11.COM REL11.2
NetK11_NO: K11.NO REL11.1
NetK12_COM: K12.COM REL12.2
NetK12_NO: K12.NO REL12.1
NetP1_1: P1.1 R8.1
NetP5_1: P5.1 U2.17
NetQ1_2: Q1.1 R6.2
NetQ2_2: Q2.1 R7.2
NetQ3_2: Q3.1 R14.2
NetQ4_2: Q4.1 R15.2
NetQ5_2: Q5.1 R20.2
NetQ6_2: Q6.1 R21.2
NetQ7_2: Q7.1 R29.2
NetQ8_2: Q8.1 R30.2
NetQ9_2: Q9.1 R38.2
NetQ10_2: Q10.1 R39.2
NetQ11_2: Q11.1 R46.2
NetQ12_2: Q12.1 R47.2
NetR5_1: R5.1 U2.19
NetU1_1: U1.1 U2.1
NEUTRAL: CNN1.4 CNN2.4
nRESET: C3.1 P3.6 R13.1 U3.30
PHASE_1: CNN1.1 CNN2.1
PHASE_2: CNN1.2 CNN2.2
PHASE_3: CNN1.3 CNN2.3
RELAY_1: R7.1 U3.78
RELAY_2: R14.1 U3.77
RELAY_3: R20.1 U3.76
RELAY_4: R29.1 U3.75
RELAY_5: R38.1 U3.74
RELAY_6: R6.1 U3.73
RELAY_7: R15.1 U3.72
RELAY_8: R21.1 U3.71
RELAY_9: R30.1 U3.53
RELAY_10: R39.1 U3.54
RELAY_11: R46.1 U3.55
RELAY_12: R47.1 U3.56
RX: P6.2 U3.2
RXCAN: U1.4 U2.2
SCK: P3.5 U2.14 U3.20
SCL: J1.4 U3.44
SDA: J1.3 U3.43
SERVO_CON: U3.26
SERVO_CON_5V: P4.2
SERVO_CON_12V: P7.2
TCK: P2.6 U3.93
TDI: P2.3 U3.90
TDO: P2.4 U3.91
TMS: P2.5 U3.92
TOF_INT: J1.5 U3.46
TX: P6.3 U3.3
XSHUT: J1.6 U3.60
XTAL1: R31.1 U3.34 Y2.1
XTAL2: R31.2 U3.33 Y2.3
pads on no net: K1.NC K2.NC K3.NC K4.NC K5.NC K6.NC K7.NC K8.NC K9.NC K10.NC K11.NC K12.NC U1.5 U2.3 U2.4 U2.5 U2.6 U2.7 U2.11 U2.12 U2.15 U3.1 U3.4 U3.5 U3.6 U3.7 U3.8 U3.9 U3.12 U3.13 U3.14 U3.15 U3.16 U3.17 U3.18 U3.23 U3.24 U3.25 U3.27 U3.28 U3.29 U3.35 U3.36 U3.37 U3.38 U3.39 U3.40 U3.41 U3.42 U3.47 U3.48 U3.49 U3.50 U3.51 U3.52 U3.57 U3.58 U3.59 U3.63 U3.64 U3.65 U3.66 U3.67 U3.68 U3.69 U3.70 U3.79 U3.82 U3.83 U3.84 U3.85 U3.86 U3.87 U3.88 U3.89 U3.94 U3.95 U3.96 U3.97